# Altium PCB 九键触摸面板-控制板-V3.PcbDoc
Units mm, origin at the board's own origin, x right, y up, seen from the top; angles counter-clockwise.
Board outline 54.4 x 59.2 mm, 2 copper layers (Top Layer, Bottom Layer), stack 1.571 mm thick; 76 components, 81 nets, 267 pads, 181 vias.
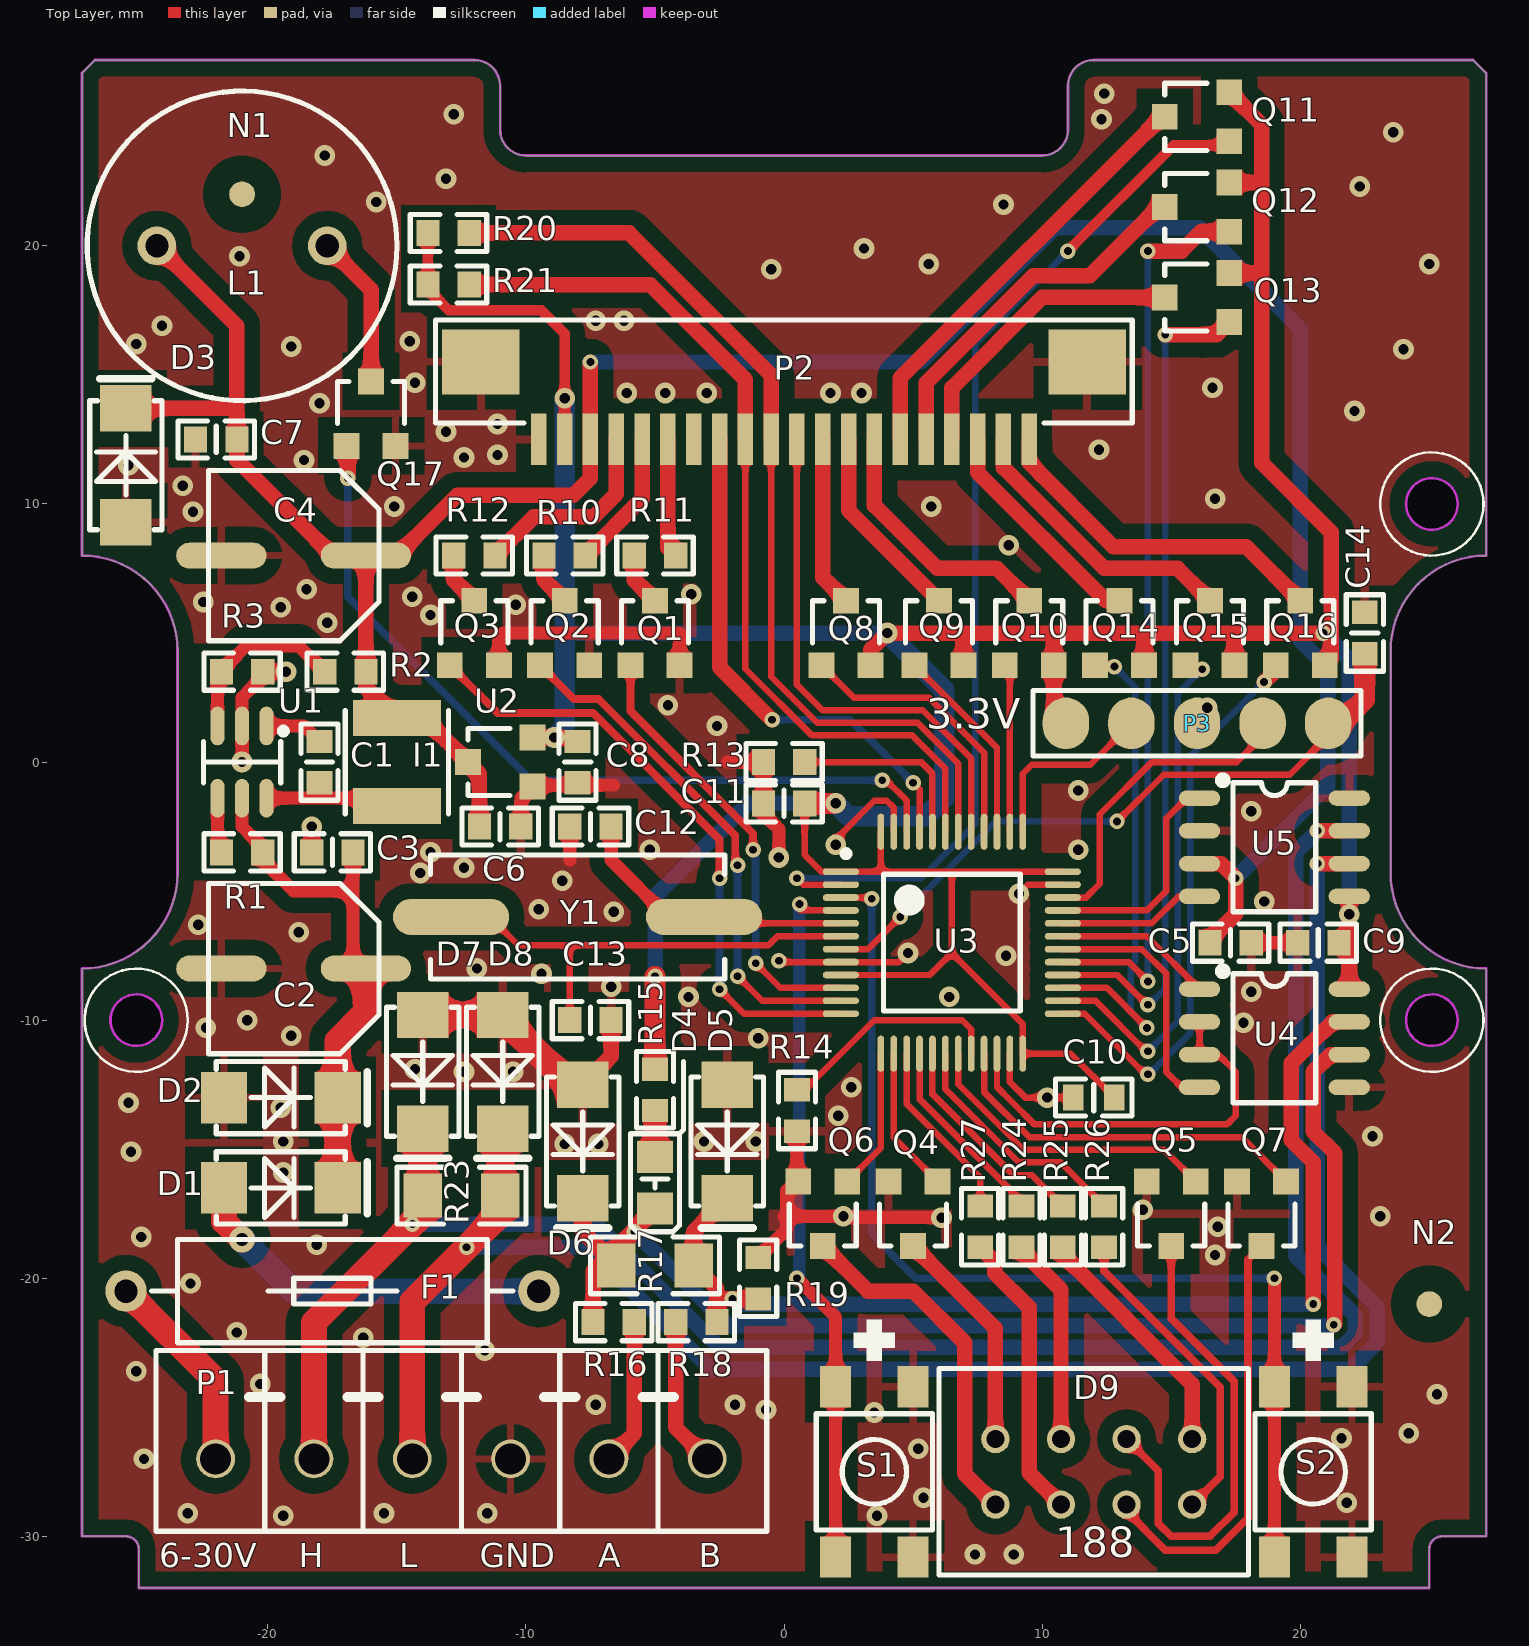
[diagram p0: Top Layer view]
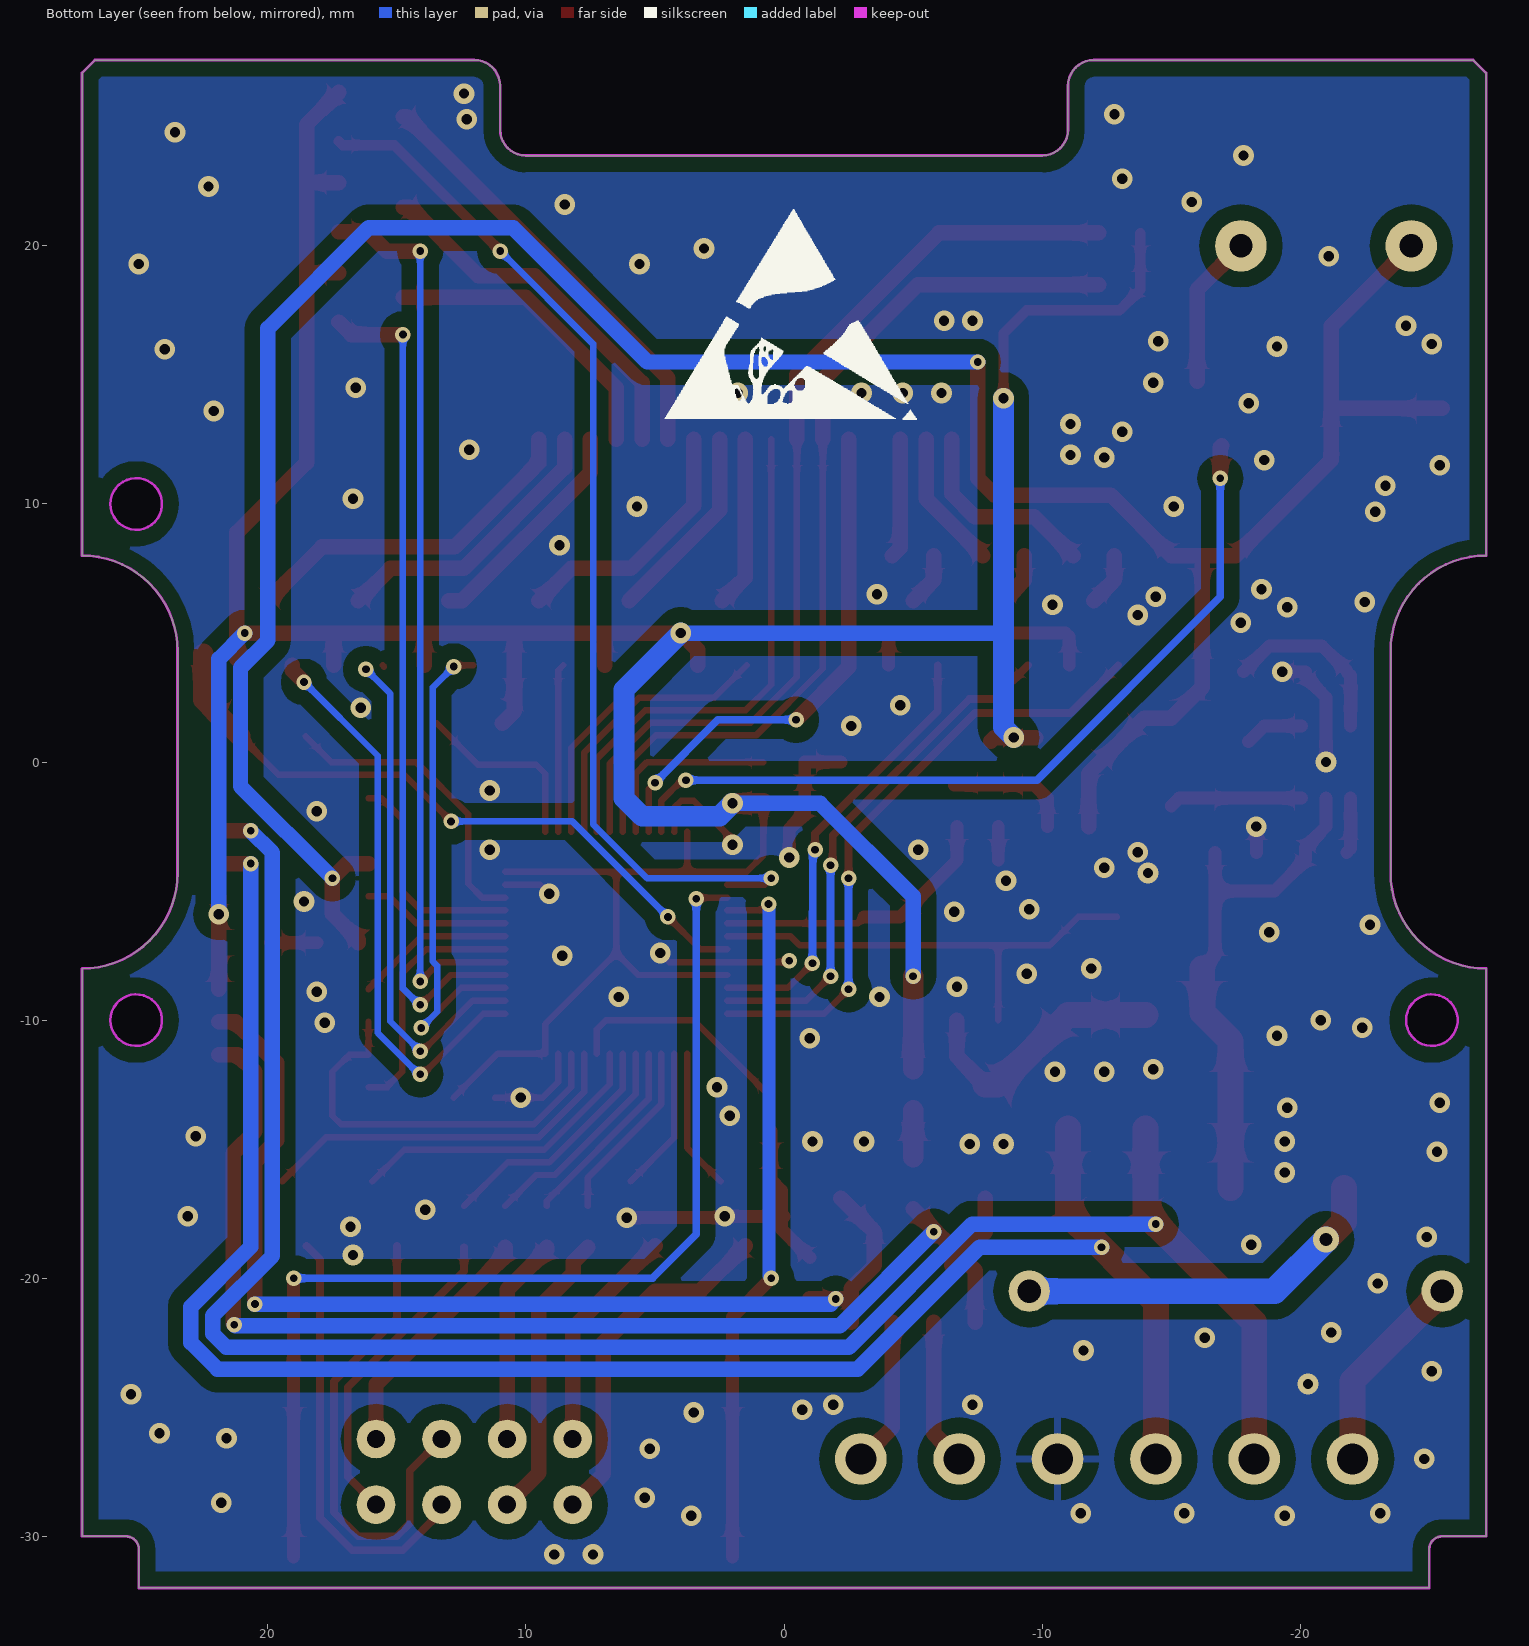
[diagram p1: Bottom Layer view, seen from below]

## Layer stack, top to bottom
Top Solder: solder mask 0.0102, Solder Resist, Dk 3.5
Top Layer: signal copper 0.0356
Dielectric1: dielectric 1.5, FR-4, Dk 4.8
Bottom Layer: signal copper 0.0356
Bottom Solder: solder mask 0.0102, Solder Resist, Dk 3.5

## Board outline
-25,-30.5 ccw(c-25.5,-30.5) -25.5,-30 -27.2,-30 -27.2,-8 ccw(c-27.2,-4.3) -23.5,-4.3 -23.5,4.3 ccw(c-27.2,4.3) -27.2,8 -27.2,26.7 -26.7,27.2 -12,27.2 cw(c-12,26.2) -11,26.2 -11,24.5 ccw(c-10,24.5) -10,23.5 10,23.5 ccw(c10,24.5) 11,24.5 11,26.2 cw(c12,26.2) 12,27.2 26.7,27.2 27.2,26.7 27.2,8 ccw(c27.2,4.3) 23.5,4.3 23.5,-4.3 ccw(c27.2,-4.3) 27.2,-8 27.2,-30 25.5,-30 ccw(c25.5,-30.5) 25,-30.5 25,-32 -25,-32
cut-out: -25.1,-11 cw(c-25.1,-10) -26.1,-10 cw(c-25.1,-10) -25.1,-9 cw(c-25.1,-10) -24.1,-10 cw(c-25.1,-10)
cut-out: 25.1,9 cw(c25.1,10) 24.1,10 cw(c25.1,10) 25.1,11 cw(c25.1,10) 26.1,10 cw(c25.1,10)
cut-out: 25.1,-11 cw(c25.1,-10) 24.1,-10 cw(c25.1,-10) 25.1,-9 cw(c25.1,-10) 26.1,-10 cw(c25.1,-10)

## Design rules (kind name [scope] priority, off if disabled: settings)
Clearance Clearance敷铜间隔 [InPolygon] p1: gap=0.6
Clearance Clearance通用间隔 [All] p2: gap=0.24
PlaneConnect [All] p1: planeconnectstyle=Relief reliefexpansion=0.508 reliefentries=4 reliefconductorwidth=0.3 reliefairgap=0.3
PolygonConnect PolygonConnect_过孔 [All vs IsVia] p1: connectstyle=Direct reliefconductorwidth=0.254 reliefentries=4 polygonreliefangle="90 Angle" airgapwidth=0.254
PolygonConnect [All] p2: connectstyle=Relief reliefconductorwidth=0.3 reliefentries=4 polygonreliefangle="90 Angle" airgapwidth=0.6
RoutingVias [All] p1: holewidth=0.5 width=1 viastyle="Through Hole" minholewidth=0.4 minwidth=0.8 maxholewidth=10 maxwidth=10
SolderMaskExpansion [All] p1: expansion=0.102
Width [All] p1: maxlimit=10 minlimit=0.25 preferedwidth=0.5
29 further rules are at their usual default settings.

## Components (designator, comment, footprint, x,y, rotation, side; value= is the part's Value field where it differs from the comment)
C1 "104" C-0603#1 -18,0 r90 top
C2 "100UF/35V" 贴片固态电容6.3*7.7 -19,-8 r180 top
C3 "104/50V" C-0603#1 -17.5,-3.5 r0 top
C4 "470UF/10V" 贴片固态电容6.3*7.7 -19,8 r180 top
C5 "104" C-0603#1 17.3,-7 r180 top
C6 "106" C-0603#1 -11,-2.5 r180 top
C7 "224" C-0603#1 -22,12.5 r0 top
C8 "226" C-0603#1 -8,0 r90 top
C9 "104" C-0603#1 20.7,-7 r0 top
C10 "104" C-0603#2 12,-13 r0 top
C11 "104" C-0603#1 0,-1.6 r0 top
C12 "20P" C-0603#1 -7.5,-2.5 r0 top
C13 "20P" C-0603#1 -7.5,-10 r180 top
C14 "104" C-0603#1 22.5,5 r270 top
D1 "M7" SMA -19.5,-16.5 r180 top
D2 "SMAJ30A" SMA -19.5,-13 r180 top
D3 "SMAJ5.0A" SMA -25.5,11.5 r270 top
D4 "SS12" SOD-323/0805 -5,-16.3 r90 top
D5 "SMAJ5.0A" SMA -2.2,-14.7 r90 top
D6 "SMAJ5.0A" SMA -7.8,-14.7 r90 top
D7 "SMAJ5.0A" SMA -14,-12 r90 top
D8 "SMAJ5.0A" SMA -10.9,-12 r90 top
D9 "2位半数码管" 2位半0.25英寸 12,-27.5 r0 top
F1 "F0.5A" FUSE-3*10带引线 -17.5,-20.5 r0 top
I1 "10uH" 4030 -15,0 r90 top
L1 "64R" "蜂鸣器 无源 12*8.2" -21,20 r0 top
N1 "光学定位点" MARK-1mm-3mm -21,22 r0 top
N2 "光学定位点" MARK-1mm-3mm 25,-21 r0 top
P1 "" KF2EDG-3.81-6P -12.5,-27 r0 top
P2 "FPC-1.0-20P" FPC-1.0mm_20P下接翻盖 0,14 r0 top
P3 "ST-LINK" 5P下载口 16,1.5 r0 top
Q1 "2N7002" SOT-23 -5,5 r270 top
Q2 "2N7002" SOT-23 -8.5,5 r270 top
Q3 "2N7002" SOT-23 -12,5 r270 top
Q4 "2N7002" SOT-23 5,-17.5 r90 top
Q5 "2N7002" SOT-23 15,-17.5 r90 top
Q6 "2N7002" SOT-23 1.5,-17.5 r90 top
Q7 "2N7002" SOT-23 18.5,-17.5 r90 top
Q8 "SI2301" SOT-23 2.4,5 r270 top
Q9 "SI2301" SOT-23 6,5 r270 top
Q10 "SI2301" SOT-23 9.5,5 r270 top
Q11 "SI2301" SOT-23 16,25 r0 top
Q12 "SI2301" SOT-23 16,21.5 r0 top
Q13 "SI2301" SOT-23 16,18 r0 top
Q14 "SI2301" SOT-23 13,5 r270 top
Q15 "SI2301" SOT-23 16.5,5 r270 top
Q16 "SI2301" SOT-23 20,5 r270 top
Q17 "2N7002" SOT-23 -16,13.5 r270 top
R1 "100K" R-0603 -21,-3.5 r180 top
R2 "11K" R-0603 -17,3.5 r180 top
R3 "2.1K" R-0603 -21,3.5 r0 top
R10 "150" R-0603 -8.5,8 r0 top
R11 "100" R-0603 -5,8 r0 top
R12 "200" R-0603 -12,8 r0 top
R13 "10K" R-0603 0,0 r180 top
R14 "10K" R-0603 0.5,-13.5 r270 top
R15 "1K" R-0603 -5,-12.7 r270 top
R16 "10" R-0603 -6.6,-21.7 r180 top
R17 "1K" R-1206 -5,-19.5 r0 top
R18 "10" R-0603 -3.4,-21.7 r0 top
R19 "1K" R-0603 -1,-20 r270 top
R20 "10K" R-0603 -13,20.5 r180 top
R21 "10K" R-0603 -13,18.5 r180 top
R23 "120" R-1206 -12.5,-16.8 r0 top
R24 "100" R-0603 9.2,-18 r270 top
R25 "100" R-0603 10.8,-18 r270 top
R26 "100" R-0603 12.4,-18 r270 top
R27 "100" R-0603 7.6,-18 r270 top
S1 "SB-6*6*5" SB-4.5*4.5*9 3.5,-27.5 r90 top
S2 "SB-6*6*5" SB-4.5*4.5*9 20.5,-27.5 r90 top
U1 "BL9341" SOT-23-6-m -21,0 r90 top
U2 "ME6206A33M3G" SOT-23 -11,0 r0 top
U3 "GD32F103C8T6" LQFP48-L 6.5,-7 r270 top locked
U4 "TP8485E-SR" SOP-8-m 19,-10.7 r270 top
U5 "TJA1051T/3" SOP-8-M 19,-3.3 r270 top
Y1 "8M" HC-49SMD -8,-6 r0 top

## Footprints (in the part's own frame and the unit in brackets; to place one, negate y for a bottom-side part, rotate by r counter-clockwise, add the part's x,y. Pads: shape width x height; smd on the part's side, far side on the other; paste and mask are expansions set on the pad)
2位半0.25英寸 [mm]
  round 1.1 / inner round 1.1 / far side round 1.5 hole 0.7: 1(-3.81,-1.27) 2(-1.27,-1.27) 3(1.27,-1.27) 4(3.81,-1.27) 5(3.81,1.27) 6(1.27,1.27) 7(-1.27,1.27) 8(-3.81,1.27)
  silkscreen extent -6,-4 6,4, body extent -6,-4 6,4, height 4
5P下载口 [mm]
  oval 1.8x2 smd paste-1: 1(-5.08,0) 2(-2.54,0) 3(0,0) 4(2.54,0) 5(5.08,0)
  silkscreen extent -6.35,-1.27 6.35,1.27
4030 [mm]
  rect 1.4x3.4 smd: 1(-1.7,0) 2(1.7,0)
  silkscreen extent -2,-2 2,2, body extent -2,-2 2,2, height 3
C-0603#1 [mm]
  rect 0.9x1 smd: 1(-0.8,0) 2(0.8,0)
  silkscreen extent -1.48,-0.72 1.48,0.72, body extent -0.8,-0.4 0.8,0.4, height 0.6
C-0603#2 [mm]
  rect 0.8x1 smd: 1(-0.8,0) 2(0.8,0)
  silkscreen extent -1.48,-0.72 1.48,0.72, body extent -0.8,-0.4 0.8,0.4, height 0.6
FPC-1.0mm_20P下接翻盖 [mm]
  rect 0.6x2 smd: 1(-9.5,-1.5) 2(-8.5,-1.5) 3(-7.5,-1.5) 4(-6.5,-1.5) 5(-5.5,-1.5) 6(-4.5,-1.5) 7(-3.5,-1.5) 8(-2.5,-1.5) 9(-1.5,-1.5) 10(-0.5,-1.5) 11(0.5,-1.5) 12(1.5,-1.5) 13(2.5,-1.5) 14(3.5,-1.5) 15(4.5,-1.5) 16(5.5,-1.5) 17(6.5,-1.5) 18(7.5,-1.5) 19(8.5,-1.5) 20(9.5,-1.5)
  rect 3x2.5 smd: 21(11.75,1.5) 22(-11.75,1.5)
  silkscreen extent -13.51,-0.86 13.49,3.13
FUSE-3*10带引线 [mm]
  round 1.6 hole 0.9: 1(-8,0) 2(8,0)
  silkscreen extent -7,-2 7,2, body extent -7.75,-1.9 7.75,1.9, height 4.1
HC-49SMD [mm]
  oval 4.5x1.4 smd: 1(-4.9,0) 2(4.9,0)
  silkscreen extent -5.7,-2.4 5.7,2.4, body extent -6.7,-2.46 6.7,2.44, height 4
KF2EDG-3.81-6P [mm]
  round 1.5 / inner round 1.5 / far side round 2 hole 1.2: 1(-9.525,0) 2(-5.715,0) 3(-1.905,0) 4(1.905,0) 5(5.715,0) 6(9.525,0)
  silkscreen extent -11.83,-2.8 11.83,4.2, body extent -11.77,-2.8 11.77,4.27, height 9.25
LQFP48-L [mm]
  oval 0.26x1.4 smd: 1(-2.75,-4.3) 2(-2.25,-4.3) 3(-1.75,-4.3) 4(-1.25,-4.3) 5(-0.75,-4.3) 6(-0.25,-4.3) 7(0.25,-4.3) 8(0.75,-4.3) 9(1.25,-4.3) 10(1.75,-4.3) 11(2.25,-4.3) 12(2.75,-4.3) 25(2.75,4.3) 26(2.25,4.3) 27(1.75,4.3) 28(1.25,4.3) 29(0.75,4.3) 30(0.25,4.3) 31(-0.25,4.3) 32(-0.75,4.3) 33(-1.25,4.3) 34(-1.75,4.3) 35(-2.25,4.3) 36(-2.75,4.3)
  oval 1.4x0.26 smd: 13(4.3,-2.75) 14(4.3,-2.25) 15(4.3,-1.75) 16(4.3,-1.25) 17(4.3,-0.75) 18(4.3,-0.25) 19(4.3,0.25) 20(4.3,0.75) 21(4.3,1.25) 22(4.3,1.75) 23(4.3,2.25) 24(4.3,2.75) 37(-4.3,2.75) 38(-4.3,2.25) 39(-4.3,1.75) 40(-4.3,1.25) 41(-4.3,0.75) 42(-4.3,0.25) 43(-4.3,-0.25) 44(-4.3,-0.75) 45(-4.3,-1.25) 46(-4.3,-1.75) 47(-4.3,-2.25) 48(-4.3,-2.75)
  silkscreen extent -3.57,-4.22 2.65,2.65, body extent -4.5,-4.5 4.5,4.5, height 1.5
MARK-1mm-3mm [mm]
  round 1 smd paste-0.6 mask+1: 1(0,0)
  Top Layer pour cut-out: -1.5,0 -1.386,-0.574 -1.061,-1.061 -0.574,-1.386 0,-1.5 0,-1.5 0.574,-1.386 1.061,-1.061 1.386,-0.574 1.5,0 1.5,0 1.386,0.574 1.061,1.061 0.574,1.386 0,1.5 0,1.5 -0.574,1.386 -1.061,1.061 -1.386,0.574 -1.5,0
R-0603 [mm]
  rect 0.9x1 smd: 1(-0.8,0) 2(0.8,0)
  silkscreen extent -1.48,-0.72 1.48,0.72, body extent -0.8,-0.4 0.8,0.4, height 0.45
R-1206 [mm]
  rect 1.5x1.7 smd: 1(-1.5,0) 2(1.5,0)
  silkscreen extent -2.5,-1.1 2.5,1.1, body extent -1.6,-0.8 1.6,0.8, height 0.6
SB-4.5*4.5*9 [mm]
  rect 1.6x1.2 smd: 1(-3.3,1.5) 1(3.3,1.5) 2(-3.3,-1.5) 2(3.3,-1.5)
  silkscreen extent -2.25,-2.25 2.25,2.25, body extent -2.25,-2.25 2.25,2.25, height 11
SMA [mm]
  rect 1.8x2 smd: 1(2.2,0) 2(-2.2,0)
  silkscreen extent -3.35,-1.4 2.5,1.4, body extent -2.75,-1.4 2.75,1.4, height 2.6
SOD-323/0805 [mm]
  rect 1.25x1.4 smd: 1(1,0) 2(-1,0)
  silkscreen extent -1.9,-0.95 1.9,0.95, body extent -1.35,-0.68 1.35,0.67, height 0.79
SOP-8-m [mm]
  oval 0.6x1.6 smd: 1(-1.905,-2.9) 2(-0.635,-2.9) 3(0.635,-2.9) 4(1.905,-2.9) 5(1.905,2.9) 6(0.635,2.9) 7(-0.635,2.9) 8(-1.905,2.9)
  silkscreen extent -2.89,-2.3 2.5,1.6, body extent -2.45,-3 2.45,3, height 1.7
SOP-8-M [mm]
  oval 0.6x1.6 smd: 1(-1.905,-2.9) 2(-0.635,-2.9) 3(0.635,-2.9) 4(1.905,-2.9) 5(1.905,2.9) 6(0.635,2.9) 7(-0.635,2.9) 8(-1.905,2.9)
  silkscreen extent -2.89,-2.3 2.5,1.6, body extent -2.45,-3 2.45,3, height 1.7
SOT-23 [mm]
  rect 1x1 smd: 1(1.25,-0.95) 2(1.25,0.95) 3(-1.25,0)
  silkscreen extent -1.25,-1.3 0.38,1.3, body extent -1.4,-1.45 1.4,1.45, height 1.2
SOT-23-6-m [mm]
  oval 1.5x0.55 smd: 1(1.4,-0.95) 2(1.4,0) 3(1.4,0.95) 4(-1.4,0.95) 5(-1.4,0) 6(-1.4,-0.95)
  silkscreen extent -0.8,-1.7 1.3,1.5, body extent -1.21,-1.4 1.21,1.4, height 1.08
"蜂鸣器 无源 12*8.2" [mm]
  round 1.5 / inner round 1.5 / far side round 2 hole 0.9: 1(-3.3,0) 2(3.3,0)
  silkscreen extent -6,-6 6,6, body extent -5.95,-5.99 6,5.99, height 8.7
贴片固态电容6.3*7.7 [mm]
  oval 3.5x1 smd: 1(-2.8,0) 2(2.8,0)
  silkscreen extent -3.3,-3.3 3.3,3.3, body extent -3.5,-3.3 3.5,3.3, height 7.71

## Part data
C1 C3 C5 C6 C7 C8 C9 C10 C11: library part Cap, "Capacitor"
C2 C4: library part "Cap Pol1", "Polarized Capacitor (Radial)"
C12 C13 C14: library part Cap-0603, "0805"
D1: "SMA"
D2 D3 D5 D6 D7 D8: library part TVS-1, "SMB"
D4: library part SS14, "SMA"
F1: library part "Fuse 1", "Fuse"
I1: library part Inductance3
L1: library part Bell, "Electrical Bell"
N1 N2: library part 无引脚
P1: library part "Header 6", "Header, 6-Pin"
P2: library part "Header 22", "Header, 22-Pin"
P3: library part ST-LINK-STM32
Q8 Q9 Q10 Q11 Q12 Q13 Q14 Q15 Q16: "SOT-23"
R1 R2 R3 R10 R11 R12 R13 R14 R20 R21 R24 R25 R26 R27: library part Res2-0603, "0603"
R15 R16 R17 R18 R19 R23: library part Res2, "Resistor"
U2: "LDO稳压 SOT-23"
U4: library part MAX3082, "RS485总线转串口"
Y1: library part 晶振

## Via types
v1: diameter 0.8, hole 0.4, Top Layer to Bottom Layer, tented both sides, 139 vias
v2: diameter 0.6, hole 0.3, Top Layer to Bottom Layer, tented both sides, 41 vias
v3: diameter 1, hole 0.5, Top Layer to Bottom Layer, tented both sides, 1 vias

## Nets (pads, with @x,y where several pads share a name; then routed paths per layer and width w, separated by ;. In a path a pad name is that pad's centre, name@x,y a point inside that pad or via, vN(x,y) a via of type N, cw(c..) or ccw(c..) an arc to the next point about the centre after c; other vN are vias at no path point)
3.3V: C8.2 C9.2 C10.2 C11.2 P2.2 P3.1 Q8.2 Q9.2 Q10.2 Q11.2 Q12.2 Q13.2 Q14.2 Q15.2 Q16.2 R15.1 R20.2 R21.2 U2.2 U3.1 U3.9 U3.24 U3.36 U3.48 U4.8 U5.5 | length 166.6
  Top Layer w0.25: C11.2 0.8,-3.6 1.45,-4.25 U3.1 3.75,-4.25 ; U3.9 5.65,-8.25 6.5,-7.4 ; U3.48 3.75,-4.25 ; U3.36 6.5,-4.25 ; C10.2 11.1,-11.3 U3.24 9.25,-10.15 6.5,-7.4 ; 3.75,-4.25 6.5,-4.25 ; 6.5,-7.4 6.5,-4.25
  Top Layer w0.4: R20.2 R21.2 -13.8,18.3 -13,17.5 -9.4,17.5 -8.5,16.6 v1(-8.5,14.1) P2.2
  Top Layer w0.6: U2.2 v1(-8.9,0.95) -8.15,0.95 C8.2 ; Q8.2 3.35,4.35 v1(4,5) 6.9,5 ; Q9.2 6.95,4.95 6.9,5 ; P3.1 10.45,1.97 Q10.2 10.45,4.95 10.5,5 ; Q14.2 13.95,4.95 ; Q13.2 18.45,18.95 ; Q12.2 18.45,22.45 ; Q11.2 18.5,24.7 18.5,11.6 21.2,8.9 21.2,5 ; Q15.2 17.45,4.95 ; Q16.2 21.2,4 21.2,5 ; U4.8 v1(21.9,-5.9) U5.5 ; 6.9,5 10.5,5 ; 10.5,5 21.2,5
  Top Layer w0.8: R15.1 v2(-5,-8.3) ; C11.2 v1(2,-1.6)
  Bottom Layer w0.6: -8.5,5 v1(4,5) ; v2(-5,-8.3) -5,-5.2 -1.4,-1.6 v1(2,-1.6) ; v2(20.9,5) 21.9,4 v1(21.9,-5.9)
  Bottom Layer w0.8: v1(-8.9,0.95) -8.5,1.35 -8.5,5 v1(-8.5,14.1) ; v1(2,-1.6) 2.5,-2.1 5.5,-2.1 6.2,-1.4 6.2,2.8 v1(4,5)
5V: C4.1 C5.2 C6.2 C7.2 D3.2 I1.2 L1.1 P2.3 R2.1 U2.3 U5.3 | length 106.5
  Top Layer w0.6: D3.2 -21.5,13.7 ; L1.1 -21.2,16.9 C7.2 -21.2,11.7 -17.5,8 C4.1 ; C6.2 -11.8,-0.45 U2.3 -13.95,1.7 I1.2 -16.2,2.9 R2.1 C4.1 ; v2(-7.5,15.5) P2.3 -7.5,11 -8.16,10.34 -12.66,10.34 -15,8 C4.1 ; U5.3 16.935,-3.935 v2(17.5,-4.5) 17.5,-5.886 16.5,-6.886 C5.2
  Bottom Layer w0.6: v2(-7.5,15.5) 5.3,15.5 10.5,20.7 16.1,20.7 20,16.8 20,4.712 21.06,3.652 21.06,-0.94 v2(17.5,-4.5)
24V: F1.1 P1.1 | length 7.9
  Top Layer w1: F1.1 -22.025,-23.975 P1.1
485-A: P1.5 R16.1 | length 5.7
  Top Layer w0.6: P1.5 -5.8,-26.015 R16.1
485-B: P1.6 R18.1 | length 5.8
  Top Layer w0.6: R18.1 -4.2,-25.775 P1.6
485-RE/DE: U3.22 U4.2 U4.3 | length 15.9
  Top Layer w0.25: U3.22 8.25,-12.592 8.779,-13.121 8.781,-13.121 9.7,-14.04 17.16,-14.04 17.5,-13.7 17.5,-12 16.835,-11.335 U4.3 U4.2
485-RXD: U3.31 U4.1 | length 6.1
  Top Layer w0.25: U3.31 14.055,-6.75 U4.1
485-TXD: U3.30 U4.4 | length 9.8
  Top Layer w0.25: U3.30 13.862,-7.25 14.8,-8.188 14.8,-12 15.405,-12.605 U4.4
A/F: R24.1 U3.16 | length 7.5
  Top Layer w0.25: U3.16 5.25,-13.057 9.2,-17.007 R24.1
B: P2.6 R11.2 | length 4.6
  Top Layer w0.6: P2.6 -4.5,8.3 R11.2
B/G: R25.1 U3.17 | length 8.4
  Top Layer w0.25: U3.17 5.75,-12.864 8.886,-16 9.6,-16 R25.1
C/E: R26.1 U3.18 | length 9.4
  Top Layer w0.25: U3.18 6.25,-12.671 9.089,-15.51 10.71,-15.51 R26.1
CAN-H: D7.2 P1.2 R23.1 U5.7 | length 75.3
  Top Layer w0.6: v2(20.665,-2.665) U5.7
  Top Layer w1: P1.2 -18.215,-21.715 -14,-17.5 D7.2
  Bottom Layer w0.6: v2(-14.4,-17.9) -7.288,-17.9 -2.508,-22.68 21.608,-22.68 22.14,-22.148 22.14,-21.452 19.825,-19.137 19.825,-3.505 v2(20.665,-2.665)
CAN-L: D8.2 P1.3 R23.2 U5.6 | length 72.6
  Top Layer w0.6: v2(20.665,-3.935) U5.6
  Top Layer w1: P1.3 -14.405,-20.905 -11,-17.5 D8.2@-11,-14.2
  Bottom Layer w0.6: v2(-12.3,-18.8) -7.576,-18.8 -2.856,-23.52 21.956,-23.52 22.98,-22.496 22.98,-21.104 20.665,-18.789 v2(20.665,-3.935)
CAN-RXD: U3.32 U5.4 | length 5.7
  Top Layer w0.25: U3.32 14.25,-6.25 15.295,-5.205 U5.4
CAN-TXD: U3.33 U5.1 | length 8.7
  Top Layer w0.25: U3.33 14.057,-5.75 14.8,-5.007 14.8,-2.2 15.605,-1.395 U5.1
COM1: P2.20 Q16.3 | length 13.6
  Top Layer w0.6: P2.20 9.5,11.6 12.76,8.34 17.91,8.34 Q16.3
COM2: P2.12 Q8.3 | length 6.6
  Top Layer w0.6: P2.12 1.5,7.15 Q8.3
COM3: P2.13 Q9.3 | length 7.7
  Top Layer w0.6: P2.13 2.5,9.75 Q9.3
COM4: P2.19 Q15.3 | length 11.2
  Top Layer w0.6: P2.19 8.5,11.412 12.412,7.5 15.25,7.5 Q15.3
COM5: P2.15 Q11.3 | length 16.8
  Top Layer w0.6: P2.15 4.5,14.876 14.624,25 Q11.3
COM6: P2.14 Q10.3 | length 10.1
  Top Layer w0.6: P2.14 3.5,9.938 5.938,7.5 8.25,7.5 Q10.3
COM7: P2.18 Q14.3 | length 8.8
  Top Layer w0.6: P2.18 7.5,11.224 12.474,6.25 Q14.3
COM8: P2.17 Q13.3 | length 11.7
  Top Layer w0.6: P2.17 6.5,14.5 10,18 Q13.3
COM9: P2.16 Q12.3 | length 14.3
  Top Layer w0.6: P2.16 5.5,14.688 9.652,18.84 11.84,18.84 14.5,21.5 Q12.3
D/1C/1B: R27.1 U3.15 | length 7.1
  Top Layer w0.25: U3.15 4.75,-13.25 7.6,-16.1 R27.1
DIG1: Q4.1 U3.14 | length 5.7
  Top Layer w0.25: U3.14 4.25,-14.55 Q4.1
DIG2: Q5.1 U3.19 | length 11.9
  Top Layer w0.25: U3.19 6.75,-12.478 9.292,-15.02 14.72,-15.02 Q5.1
DIG3: Q6.1 U3.13 | length 5.5
  Top Layer w0.25: Q6.1 3.75,-14.95 U3.13
DIG4: Q7.1 U3.21 | length 14.6
  Top Layer w0.25: U3.21 7.75,-12.785 9.495,-14.53 17.73,-14.53 Q7.1
G: P2.5 R10.2 | length 5.4
  Top Layer w0.6: R10.2 -5.5,10.2 P2.5
GND: C2.2 C3.1 C4.2 C5.1 C6.1 C7.1 C8.1 C9.1 C10.1 C11.1 C12.1 C13.1 C14.1 D2.1 D3.1 D5.1 D6.1 D7.1 D8.1 P1.4 P2.1 P2.21 P2.22 P3.3 Q1.2 Q2.2 Q3.2 Q4.2 Q5.2 Q6.2 Q7.2 Q17.2 R3.2 R13.2 R14.2 R19.1 S1.2 S2.2 U1.2 U2.1 U3.8 U3.23 U3.35 U3.47 U4.5 U5.2 U5.8 | length 65.3
  Top Layer w0.25: v2(-0.2,-7.7) -0.15,-7.75 U3.8 4.45,-7.75 v1(4.8,-7.4) ; v1(2,-3.2) 2,-3 3.5,-1.5 3.981,-1.5 4.245,-1.764 4.245,-2.695 U3.47 ; U3.23 8.75,-12.397 9.353,-13 C10.1 ; v1(9.1,-5.1) 9.45,-4.75 U3.35
  Top Layer w0.5: v1(-21,0) U1.2 -21,2.5 -20.2,3.3 R3.2 v1(-19.3,3.5) ; C3.1 v1(-18.3,-2.5) ; Q3.2 -11.05,4.85 -10.9,5 -4.05,5 Q1.2 ; C6.1 -10.2,-1.4 U2.1 -9.7,-0.9 -6.6,-0.9 ; -8.3,-3.8 C12.1 ; -2.2,0 R13.2 C11.1 -0.8,-2 -0.2,-2.6 v1(-0.2,-3.7) ; R19.1 0.1,-18.1 0.1,-17.6 ; 0,-17.6 0.1,-17.6 ; R14.2 0.5,-16.2 0.1,-16.6 0.1,-17.6 ; v1(6.1,-17.65) 2.35,-17.65 v1(2.3,-17.6) 0.1,-17.6 ; C5.1 C9.1
  Top Layer w0.6: D6.1 -6.7,-11.4 C13.1
  Top Layer w1: D7.1 -11,-9.8 -8.3,-12.5 D6.1
  other v1: 7.4,-30.7 8.9,-30.7 -19.4,-29.2 3.6,-29.2 -23.1,-29.1 -15.5,-29.1 -11.5,-29.1 21.8,-28.7 5.4,-28.5 -24.8,-27 5.2,-26.6 21.6,-26.2 24.2,-26 3.5,-25.2 -0.7,-25.1 -7.3,-24.9 -1.9,-24.9 25.3,-24.5 -20.3,-24.1 -25.1,-23.6 -11.6,-22.8 -16.3,-22.3 -21.2,-22.1 -23,-20.2 16.7,-19.1 -18.1,-18.7 -24.9,-18.4 16.8,-18 23.1,-17.6 13.9,-17.35 -19.4,-15.9 -25.3,-15.1 -8.5,-14.8 -7.2,-14.8 -19.4,-14.7 -3.1,-14.7 -1.1,-14.7 22.8,-14.5 2.1,-13.7 -19.5,-13.4 -25.4,-13.2 10.2,-13 2.6,-12.6 -12.4,-12 -10.5,-12 -14.3,-11.9 -1,-10.7 -19.1,-10.6 -22.4,-10.3 17.8,-10.1 -20.8,-10 -3.7,-9.1 6.4,-9.1 18.1,-8.9 -6.7,-8.7 -9.4,-8.2 -11.9,-8 8.6,-7.5 -18.8,-6.6 -22.7,-6.3 -6.6,-5.8 -9.5,-5.7 18.6,-5.4 -8.6,-4.6 -14.1,-4.3 -12.4,-4.1 -13.7,-3.5 -5.2,-3.4 11.4,-3.4 18.1,-1.9 11.4,-1.1 -2.6,1.4 16.4,2.1 -4.5,2.2 -17.7,5.4 -13.7,5.7 -19.5,6 -10.4,6.1 -22.5,6.2 -14.4,6.4 -3.6,6.5 -18.5,6.7 8.7,8.4 -22.9,9.7 -15.1,9.9 5.7,9.9 16.7,10.2 -23.3,10.7 -25.4,11.5 -18.6,11.7 -12.4,11.8 -11.1,11.9 12.2,12.1 -13.1,12.8 -11.1,13.1 22.1,13.6 -18,13.9 -6.1,14.3 -4.6,14.3 -3,14.3 1.8,14.3 3,14.3 16.6,14.5 -14.3,14.7 24,16 -19.1,16.1 -25.1,16.2 -14.5,16.3 -24.1,16.9 -7.3,17.1 -6.2,17.1 -0.5,19.1 5.6,19.3 25,19.3 -21.1,19.6 3.1,19.9 8.5,21.6 -15.8,21.7 22.3,22.3 -13.1,22.6 -17.8,23.5 23.6,24.4 12.3,24.9 -12.8,25.1 12.4,25.9
NetC1_1: C1.1 I1.1 U1.6 | length 5.2
  Top Layer w0.5: U1.6 -15.3,-1.4 I1.1
NetC1_2: C1.2 U1.1 | length 2.3
  Top Layer w0.5: U1.1 -18.6,1.4 C1.2
NetC2_1: C2.1 C3.2 D1.2 D2.2 R1.1 U1.5 | length 20.4
  Top Layer w0.5: U1.5 -21,-2.5 -20.2,-3.3 R1.1 -20.2,-3.8 -19,-5 -16.7,-5 ; C3.2 -16.7,-5 ; C2.1 -16.7,-7.5 -16.7,-5
  Top Layer w1: D1.2 D2.2 -17.3,-10.8 -16.2,-9.7 C2.1
NetC12_2: C12.2 U3.5 Y1.2 | length 11.2
  Top Layer w0.25: Y1.2 -2.85,-6.25 U3.5
  Top Layer w0.5: C12.2 -6.7,-3.8 -4.5,-6 Y1.2
NetC13_2: C13.2 U3.6 Y1.1 | length 18.6
  Top Layer w0.25: Y1.1 -11.4,-6 -10.3,-7.1 -8.3,-7.1 ; C13.2 -8.3,-7.1 ; U3.6 -0.25,-6.75 -0.6,-7.1 -8.3,-7.1
NetD1_1: D1.1 F1.2 | length 14.6
  Top Layer w1: D1.1 -21.7,-17.8 v3(-21,-18.5)
  Bottom Layer w1: v3(-21,-18.5) -19,-20.5 F1.2
NetD4_1: D4.1 R15.2 | length 1.8
  Top Layer w0.8: D4.1 R15.2
NetD4_2: D4.2 D6.2 R16.2 R17.1 U4.6 | length 49
  Top Layer w0.6: D6.2 -7.8,-18.2 R17.1@-6.85,-19.15 ; R16.2 -7.4,-19.7 R17.1@-6.85,-19.15 ; R17.1 R17.1@-6.85,-19.15 ; D4.2 R17.1@-6.85,-19.15 ; v2(21.3,-21.8) 21.34,-21.76 21.34,-15.152 20.5,-14.312 20.5,-12 21.165,-11.335 U4.6
  Bottom Layer w0.6: v2(-5.8,-18.2) -2.16,-21.84 21.26,-21.84 v2(21.3,-21.8)
NetD5_2: D5.2 R17.2 R18.2 R19.2 U4.7 | length 42.4
  Top Layer w0.6: R18.2 -2.6,-20.4 R17.2 -3.5,-18.2 D5.2 ; -2.5,-20.8 R19.2 ; v2(20.5,-21) 20.5,-15.5 19.66,-14.66 19.66,-11.652 21.247,-10.065 U4.7
  Bottom Layer w0.6: v2(-2,-20.8) -1.8,-21 v2(20.5,-21)
NetD9_1: D9.1 Q6.3 | length 13.8
  Top Layer w0.6: Q6.3 3.25,-20.5 5,-20.5 7,-22.5 7,-27.58 D9.1
NetD9_2: D9.2 R27.2 | length 11.3
  Top Layer w0.6: R27.2 8.16,-19.36 8.16,-19.79 9.5,-21.13 9.5,-27.54 D9.2
NetD9_3: D9.3 Q7.3 | length 16.9
  Top Layer w0.3: D9.3 13.27,-29.034 14.776,-30.54 16.724,-30.54 17.98,-29.284 17.98,-19.27 Q7.3
NetD9_4: D9.4 R26.2 | length 12.3
  Top Layer w0.3: R26.2 12.4,-19.724 16.9,-24.224 16.9,-27.68 D9.4
NetD9_5: D9.5 R25.2 | length 9.5
  Top Layer w0.6: R25.2 10.8,-19.1 15.81,-24.11 D9.5
NetD9_6: D9.6 Q5.3 | length 18.6
  Top Layer w0.3: D9.6 14.5,-27.46 14.5,-29.5 15,-30 16.5,-30 17.44,-29.06 17.44,-24.001 15,-21.561 Q5.3
NetD9_7: D9.7 R24.2 | length 8.1
  Top Layer w0.6: R24.2 9.2,-18.914 10.73,-20.444 D9.7
NetD9_8: D9.8 Q4.3 | length 8.8
  Top Layer w0.6: Q4.3 8.19,-21.94 D9.8
NetL1_2: L1.2 Q17.3 | length 6
  Top Layer w0.6: L1.2 -16,18.3 Q17.3
NetQ1_1: Q1.1 U3.10 | length 17.3
  Top Layer w0.25: v2(-1.1,-7.8) -0.15,-8.75 U3.10
  Top Layer w0.3: Q1.1 -5.95,1.977 -1.2,-2.773 v2(-1.2,-3.4)
  Bottom Layer w0.3: v2(-1.2,-3.4) -1.11,-3.49 -1.11,-5.79 -1.1,-5.8 v2(-1.1,-7.8)
NetQ1_3: Q1.3 R11.1 | length 2.1
  Top Layer w0.6: R11.1 -5.8,7.05 Q1.3
NetQ2_1: Q2.1 U3.11 | length 20.2
  Top Layer w0.25: v2(-1.8,-8.3) -0.85,-9.25 U3.11
  Top Layer w0.3: Q2.1 -8.14,2.44 -7.176,2.44 -1.89,-2.846 -1.89,-3.91 v2(-1.8,-4)
  Bottom Layer w0.3: v2(-1.8,-8.3) v2(-1.8,-4)
NetQ2_3: Q2.3 R10.1 | length 2.1
  Top Layer w0.6: R10.1 -9.3,7.05 Q2.3
NetQ3_1: Q3.1 U3.12 | length 24.1
  Top Layer w0.25: v2(-2.5,-8.8) -1.55,-9.75 U3.12
  Top Layer w0.3: Q3.1 -11.1,1.9 -7.4,1.9 -2.5,-3 v2(-2.5,-4.5)
  Bottom Layer w0.3: v2(-2.5,-8.8) v2(-2.5,-4.5)
NetQ3_3: Q3.3 R12.1 | length 2.1
  Top Layer w0.6: R12.1 -12.8,7.05 Q3.3
NetQ8_1: Q8.1 U3.40 | length 10.8
  Top Layer w0.25: Q8.1 2.7,2.5 5.607,2.5 7.75,0.357 U3.40
NetQ9_1: Q9.1 U3.39 | length 7.8
  Top Layer w0.25: Q9.1 8.25,0.55 U3.39
NetQ10_1: Q10.1 U3.38 | length 6.5
  Top Layer w0.25: Q10.1 8.75,3.55 U3.38
NetQ11_1: Q11.1 U3.2 | length 41.3
  Top Layer w0.25: v2(0.5,-4.5) 0.75,-4.75 U3.2
  Top Layer w0.4: v2(11,19.8) 15.1,23.9 17.1,23.9 Q11.1
  Bottom Layer w0.25: v2(0.5,-4.5) 5.307,-4.5 7.4,-2.407 7.4,16.2 v2(11,19.8)
NetQ12_1: Q12.1 U3.29 | length 35.4
  Top Layer w0.25: U3.29 13.35,-7.75 v2(14.1,-8.5)
  Top Layer w0.6: v2(14.1,19.8) 15.4,19.8 16.15,20.55 Q12.1
  Bottom Layer w0.25: v2(14.1,-8.5) v2(14.1,19.8)
NetQ13_1: Q13.1 U3.28 | length 32.7
  Top Layer w0.25: U3.28 12.91,-8.25 14.06,-9.4 v2(14.1,-9.4)
  Top Layer w0.6: v2(14.765,16.565) 16.765,16.565 Q13.1
  Bottom Layer w0.25: v2(14.1,-9.4) 14.14,-9.4 14.765,-8.775 v2(14.765,16.565)
NetQ14_1: Q14.1 U3.27 | length 19.3
  Top Layer w0.25: U3.27 12.51,-8.75 v2(14.06,-10.3) ; Q14.1 12.75,3.75 v2(12.8,3.7)
  Bottom Layer w0.25: v2(12.8,3.7) 13.61,2.89 13.61,-7.725 13.435,-7.9 13.435,-9.675 v2(14.06,-10.3)
NetQ15_1: Q15.1 U3.26 | length 19.8
  Top Layer w0.25: U3.26 12.069,-9.25 14.019,-11.2 v2(14.1,-11.2) ; Q15.1@15.5,3.7 Q15.1
  Bottom Layer w0.25: v2(14.1,-11.2) 15.255,-10.045 15.255,2.655 v2(16.2,3.6)
NetQ16_1: Q16.1 U3.25 | length 22.2
  Top Layer w0.25: U3.25 11.65,-9.75 14,-12.1 v2(14.1,-12.1)
  Top Layer w0.6: v2(18.6,3.1) 19.05,3.55 Q16.1
  Bottom Layer w0.25: v2(14.1,-12.1) 14.14,-12.1 15.745,-10.495 15.745,0.245 v2(18.6,3.1)
NetR1_2: R1.2 U1.4 | length 2.2
  Top Layer w0.5: U1.4 -21.95,-3.35 R1.2
NetR2_2: R2.2 R3.1 U1.3 | length 7
  Top Layer w0.5: U1.3 -21.95,3.35 R3.1 -21.8,3.543 -20.843,4.5 -18.8,4.5 R2.2
NetR13_1: R13.1 U3.44 | length 7.4
  Top Layer w0.25: R13.1 5.307,0 5.75,-0.443 U3.44
NetR14_1: R14.1 U3.20 | length 9
  Top Layer w0.25: R14.1 0.8,-12.7 3.5,-10 6.9,-10 7.25,-10.35 U3.20
NRST: C14.2 P3.5 U3.7 | length 26.1
  Top Layer w0.25: U3.7 3.25,-7.25 v2(4.5,-6) ; v2(12.9,-2.3) 14.71,-0.49 19.59,-0.49 P3.5@21.08,1
  Top Layer w0.8: P3.5@21.08,1 22.5,2.42 C14.2
  Bottom Layer w0.25: v2(4.5,-6) 8.2,-2.3 v2(12.9,-2.3)
R: P2.4 R12.2 | length 7.8
  Top Layer w0.6: R12.2 -9.7,9.5 -7.388,9.5 -6.5,10.388 P2.4
SWCLK: P3.2 U3.37 | length 7.3
  Top Layer w0.25: U3.37 9.25,-0.45 9.6,-0.1 11.86,-0.1 P3.2
SWDIO: P3.4 U3.34 | length 11.9
  Top Layer w0.25: U3.34 11.7,-5.25 12.235,-4.715 12.235,-2.025 14.26,0 17.54,0 P3.4@18.54,1
备用1: P2.7
备用2: P2.8 U3.45 | length 20.2
  Top Layer w0.25: v2(5,-0.8) 5.25,-1.05 U3.45
  Top Layer w0.6: P2.8 -2.5,3.674 v2(-0.463,1.637)
  Bottom Layer w0.3: v2(-0.463,1.637) 2.563,1.637 v2(5,-0.8)
按键+: S2.1 U3.3 | length 41.3
  Top Layer w0.25: U3.3 3.35,-5.25 v2(3.4,-5.3)
  Top Layer w0.5: S2.1@19,-30.8 19,-24.2 v2(19,-20)
  Bottom Layer w0.3: v2(3.4,-5.3) 3.4,-18.3 5.1,-20 v2(19,-20)
按键-: S1.1 U3.4 | length 27.8
  Top Layer w0.25: v2(0.6,-5.5) 0.6,-5.7 0.65,-5.75 U3.4
  Top Layer w0.5: v2(0.5,-20) 2,-21.5 2,-24.2 S1.1@2,-30.8
  Bottom Layer w0.5: v2(0.5,-20) 0.59,-19.91 0.59,-5.51 v2(0.6,-5.5)
蜂鸣器: Q17.1 U3.46 | length 32
  Top Layer w0.25: v2(3.8,-0.7) 3.96,-0.7 4.75,-1.49 U3.46
  Top Layer w0.6: Q17.1 -16.9,12.2 v2(-16.9,11)
  Bottom Layer w0.3: v2(-16.9,11) -16.9,6.4 -9.8,-0.7 v2(3.8,-0.7)
触摸-INT: P2.11 U3.41 | length 20.3
  Top Layer w0.25: P2.11 0.5,3 1.49,2.01 5.376,2.01 7.25,0.136 U3.41
触摸-SCL: P2.10 R20.1 U3.42 | length 37
  Top Layer w0.25: P2.10 -0.5,3.307 1.287,1.52 5.173,1.52 6.75,-0.057 U3.42
  Top Layer w0.6: R20.1 -6,20.5 -0.5,15 P2.10
触摸-SDA: P2.9 R21.1 U3.43 | length 35.2
  Top Layer w0.25: P2.9 -1.5,3.614 1.084,1.03 4.97,1.03 6.25,-0.25 U3.43
  Top Layer w0.6: R21.1 -5.188,18.5 -1.5,14.812 P2.9
pads on no net: N1.1 N2.1

## Polygon pours and split planes (outlines as drawn)
GND on Top Layer "Bottom Layer-No Net" (solid, remove dead copper, pour order 0): -27.2,26.7 -26.7,27.2 26.7,27.2 27.2,26.7 27.2,-30 27,-30 25,-32 -25,-32 -27,-30 -27.2,-30
GND on Bottom Layer "Bottom Layer-No Net" (solid, remove dead copper, pour order 2): -27.2,26.7 -26.7,27.2 26.7,27.2 27.2,26.7 27.2,-30 27,-30 25,-32 -25,-32 -27,-30 -27.2,-30

## Keep-outs
Keep-Out Layer:
  circle w0.1: c25.1,10 r1
  circle w0.1: c-25.1,-10 r1
  circle w0.1: c25.1,-10 r1
  lines w0.1: -27.2,-30 -27.2,-8 ccw(c-27.2,-4.3) -23.5,-4.3 -23.5,4.3 ccw(c-27.2,4.3) -27.2,8 -27.2,26.7 -26.7,27.2 -12,27.2 cw(c-12,26.2) -11,26.2 -11,24.5 ccw(c-10,24.5) -10,23.5 10,23.5 ccw(c10,24.5) 11,24.5 11,26.2 cw(c12,26.2) 12,27.2 26.7,27.2 27.2,26.7 27.2,8 ccw(c27.2,4.3) 23.5,4.3 23.5,-4.3 ccw(c27.2,-4.3) 27.2,-8 27.2,-30 25.5,-30 ccw(c25.5,-30.5) 25,-30.5 25,-32 -25,-32 -25,-30.5 ccw(c-25.5,-30.5) -25.5,-30 -27.2,-30

## Silkscreen, mask and mechanical layers (free items; w line width, h text height)
Top Overlay:
  circle w0.1: c-25.1,-10 r2
  circle w0.1: c25.1,-10 r2
  circle w0.1: c25.1,10 r2
  region: 21.3,-22.1 19.7,-22.1 19.7,-22.7 21.3,-22.7
  region: 20.8,-23.2 20.8,-21.6 20.2,-21.6 20.2,-23.2
  region: 3.8,-23.2 3.8,-21.6 3.2,-21.6 3.2,-23.2
  rectangle: 2.7,-22.7 4.3,-22.1
  lines w0.2: -4.05,-14.4 -3.9,-14.25 -3.9,-11.6
  text "3.3V" at 5.5,0.9 h2
  text "6-30V" at -24.2,-31.5 h1.6
  text "H" at -18.8,-31.5 h1.6
  text "L" at -14.9,-31.5 h1.6
  text "GND" at -11.8,-31.5 h1.6
  text "A" at -7.2,-31.5 h1.6
  text "B" at -3.3,-31.5 h1.6
Bottom Overlay:
  drawing of 774 lines, arcs and shapes, not listed
Mechanical 15:
  lines w0.2: -41.312,-98.116 46.688,-98.116 ; -41.312,-92.116 46.688,-92.116 ; -41.312,-86.116 46.688,-86.116 ; -41.312,-80.116 46.688,-80.116 ; -41.312,-74.116 46.688,-74.116 ; -41.312,-68.116 46.688,-68.116 ; -41.312,-62.116 46.688,-62.116 ; -19.312,-104.116 -19.312,-56.116 -19.312,-50.116 ; -41.312,-56.116 -41.312,-50.116 46.688,-50.116 46.688,-56.116 ; -41.312,-56.116 46.688,-56.116 ; -41.312,-56.116 -41.312,-104.116 46.688,-104.116 46.688,-56.116
  text "公司" at -40.312,-55.116 h5
  text "杭州久天科技有限公司" at -16.312,-55.116 h5
  text "工程" at -40.312,-61.116 h5
  text "设计" at -40.312,-67.116 h5
  text "邵宁鹏" at -16.312,-67.116 h5
  text "日期" at -40.312,-73.116 h5
  text "板厚" at -40.312,-79.116 h5
  text "1.2mm" at -16.324,-79.1 h5
  text "阻焊油" at -40.312,-85.116 h5
  text "绿色" at -16.312,-85.116 h5
  text "丝印" at -40.312,-91.116 h5
  text "白色" at -16.312,-91.116 h5
  text "板材" at -40.312,-97.116 h5
  text "FR-4" at -16.312,-97.116 h5
  text "其他" at -40.312,-103.116 h5
  text "有铅喷锡，过孔盖油" at -16.312,-103.116 h5

## Dimensions
25,-32 to 12,27.2 on Mechanical 15
-27.2,-30 to 27.2,-30 on Mechanical 15

## Text inside footprints (layer, text, board x,y; h text height)
D9: Top Overlay "188" at 10.5,-31.2 h2